# Altium PCB HV.PcbDoc
Units mm, origin at the board's own origin, x right, y up, seen from the top; angles counter-clockwise.
Board outline 87.12 x 40.28 mm, 2 copper layers (Top Layer, Bottom Layer), stack 1.021 mm thick; 135 components, 60 nets, 319 pads, 97 vias.
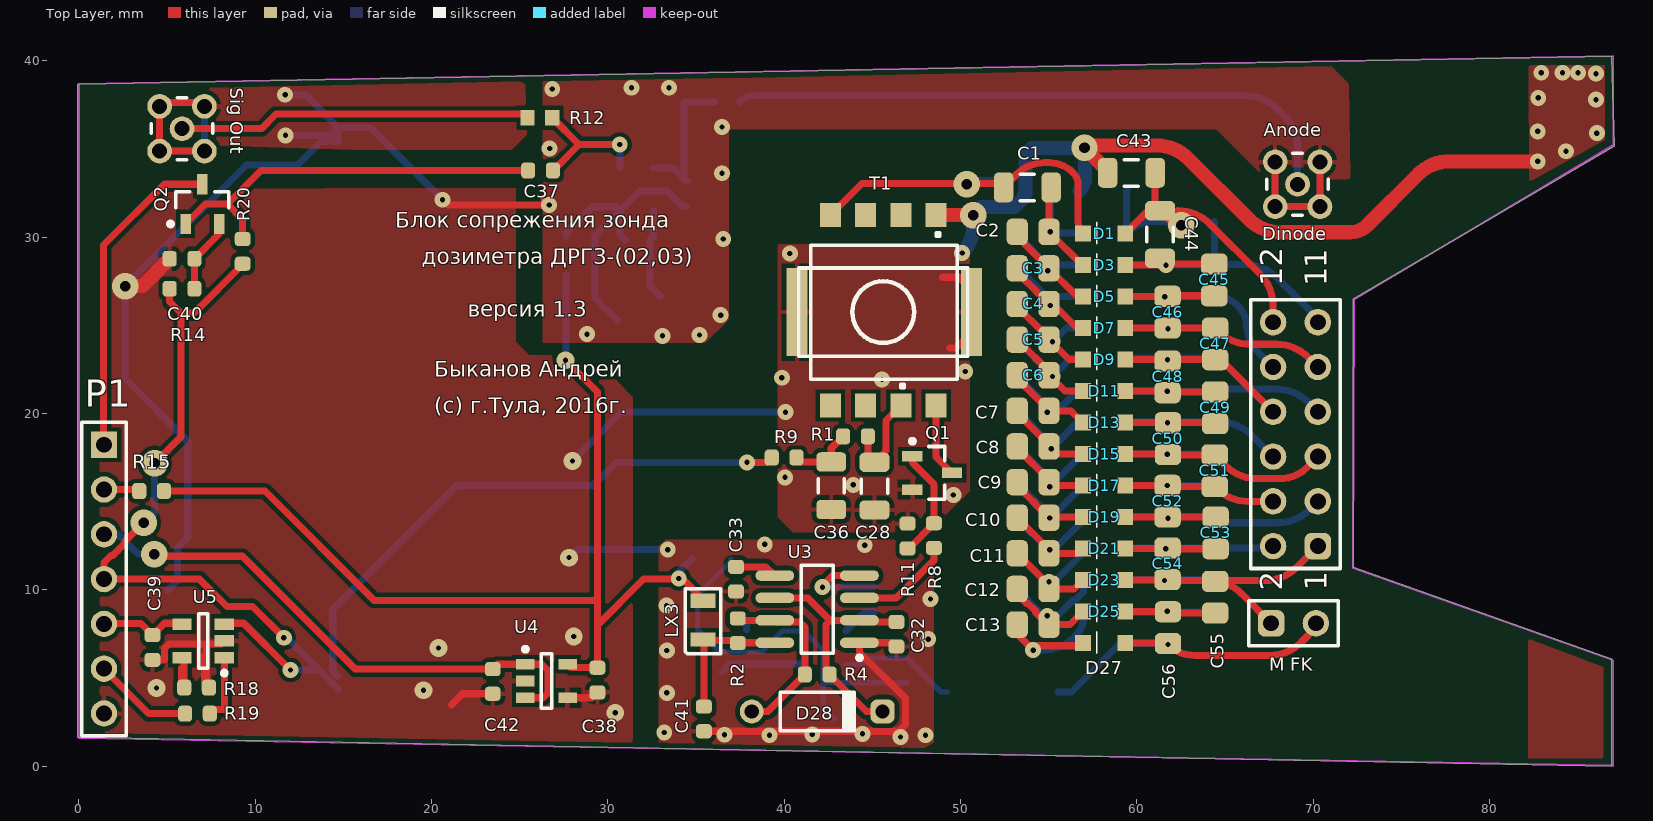
[diagram p0: Top Layer view]
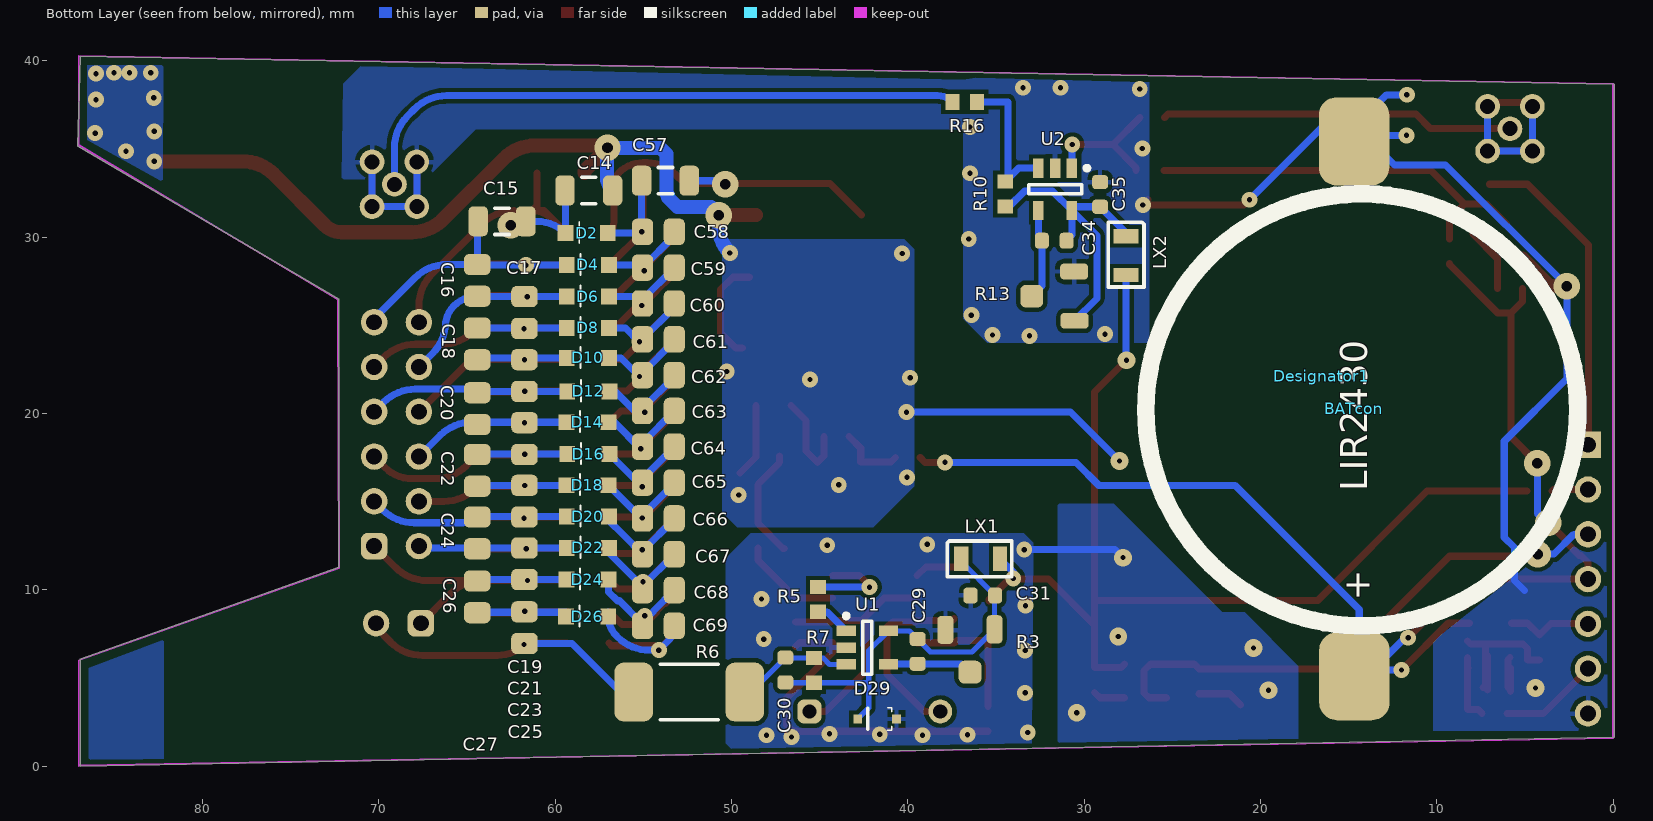
[diagram p1: Bottom Layer view, seen from below]

## Layer stack, top to bottom
Top Solder: solder mask 0.0102, Solder Resist, Dk 3.5
Top Layer: signal copper 0.0356
Dielectric1: dielectric 0.95, FR-4, Dk 4.8
Bottom Layer: signal copper 0.0356
Bottom Solder: solder mask 0.0102, Solder Resist, Dk 3.5

## Board outline
-0.05,38.675 86.95,40.25 87.073,35.15 72.275,26.475 72.275,11.275 86.95,6.05 86.95,-0.025 -0.05,1.625

## Design rules (kind name [scope] priority, off if disabled: settings)
Clearance [All] p1: gap=0.25
ComponentClearance [All] p1: gap=0.1 collisioncheckmode=3 verticalgap=0.254 showdistances=TRUE
HoleSize [All] p1: absolutevalues=TRUE maxlimit=2.54 minlimit=0.3 maxpercent=80.000 minpercent=20.000
HoleToHoleClearance [All] p1: gap=0.152 allowstackedmicrovias=TRUE
MinimumAnnularRing [All] p1: minimumring=0.2
MinimumSolderMaskSliver [All] p1: minsoldermaskwidth=0.152
PlaneClearance [All] p1: clearance=2
PlaneConnect [All] p1: planeconnectstyle=Relief reliefexpansion=0.457 reliefentries=4 reliefconductorwidth=0.3 reliefairgap=0.457
PolygonConnect PolygonConnect_via [IsVia] p1: connectstyle=Direct reliefconductorwidth=0.254 reliefentries=4 polygonreliefangle="90 Angle" airgapwidth=0.254
PolygonConnect [All] p2: connectstyle=Relief reliefconductorwidth=0.254 reliefentries=4 polygonreliefangle="90 Angle" airgapwidth=0.254
RoutingVias [All] p1: holewidth=0.3 width=0.62 viastyle="Through Hole" minholewidth=0.3 minwidth=0.62 maxholewidth=6 maxwidth=4
SilkToSilkClearance [All] p1: silktosilkclearance=0.152
SilkToSolderMaskClearance SilkscreenOverComponentPads [IsPad] p1: minsilkscreentomaskgap=0.1 clearancetoexposedcopper=TRUE
SolderMaskExpansion [All] p1: expansion=0.1
Width [All] p1: maxlimit=2.254 minlimit=0.2 preferedwidth=0.4
22 further rules are at their usual default settings.

## Components (designator, comment, footprint, x,y, rotation, side; value= is the part's Value field where it differs from the comment)
Anode "COAX-M" MMCX2.54-V5 69.125,33 r0 top
BATcon "Header 2" LIR2430 14.685,20.475 r90 bottom locked
C1 "100nF" C1206 53.8,32.825 r180 top
C2 "47nF" 0805_CAP 54.125,30.3 r0 top
C3 "47nF" 0805_CAP 54.125,28.23 r0 top
C4 "47nF" 0805_CAP 54.125,26.209 r0 top
C5 "47nF" 0805_CAP 54.125,24.189 r0 top
C6 "47nF" 0805_CAP 54.125,22.168 r0 top
C7 "47nF" 0805_CAP 54.125,20.148 r0 top
C8 "47nF" 0805_CAP 54.125,18.127 r0 top
C9 "47nF" 0805_CAP 54.125,16.107 r0 top
C10 "47nF" 0805_CAP 54.125,14.086 r0 top
C11 "47nF" 0805_CAP 54.125,12.066 r0 top
C12 "47nF" 0805_CAP 54.125,10.045 r0 top
C13 "47nF" 0805_CAP 54.125,8.025 r0 top
C14 "100nF" C1206 58.1,32.65 r180 bottom
C15 "100nF" C1206 63.025,30.9 r180 bottom
C16 "47nF" 0805_CAP 64.425,27.55 r90 bottom
C17 "47nF" 0805_CAP 61.75,25.725 r90 bottom
C18 "47nF" 0805_CAP 64.425,23.95 r90 bottom
C19 "47nF" 0805_CAP 61.75,22.15 r90 bottom
C20 "47nF" 0805_CAP 64.425,20.275 r90 bottom
C21 "47nF" 0805_CAP 61.75,18.575 r90 bottom
C22 "47nF" 0805_CAP 64.425,16.775 r90 bottom
C23 "47nF" 0805_CAP 61.75,15.025 r90 bottom
C24 "47nF" 0805_CAP 64.425,13.225 r90 bottom
C25 "47nF" 0805_CAP 61.75,11.475 r90 bottom
C26 "47nF" 0805_CAP 64.425,9.6 r90 bottom
C27 "47nF" 0805_CAP 61.75,7.85 r90 bottom
C28 "4.7uF" C1206 45.125,15.875 r270 top
C29 "1nF" 1608[0603]_CAP 39.45,6.5 r270 bottom
C30 "47pF" 1608[0603]_CAP 46.95,5.45 r90 bottom
C31 "1uF" 1608[0603]_CAP 35.75,9.675 r0 bottom
C32 "220pF" 1608[0603]_CAP 46.375,7.475 r90 top
C33 "1nF" 1608[0603]_CAP 37.275,10.6 r270 top
C34 "1nF" 1608[0603]_CAP 31.7,29.8 r0 bottom
C35 "1uF" 1608[0603]_CAP 29.1,32.425 r90 bottom
C36 "4.7uF" C1206 42.675,15.9 r270 top
C37 "10uF" 1608[0603]_CAP 26.185,33.782 r180 top
C38 "1uF" 1608[0603]_CAP 29.411,4.878 r90 top
C39 "1uF" 1608[0603]_CAP 4.175,6.725 r270 top
C40 "1uF" 1608[0603]_CAP 5.85,28.775 r180 top
C41 "1uF" 1608[0603]_CAP 35.45,2.675 r270 top
C42 "1uF" 1608[0603]_CAP 23.475,4.8 r270 top
C43 "100nF" C1206 59.7,33.65 r180 top
C44 "100nF" C1206 61.325,30.15 r90 top
C45 "47nF" 0805_CAP 64.4,27.575 r90 top
C46 "47nF" 0805_CAP 61.75,25.75 r90 top
C47 "47nF" 0805_CAP 64.45,23.95 r90 top
C48 "47nF" 0805_CAP 61.75,22.075 r90 top
C49 "47nF" 0805_CAP 64.45,20.325 r90 top
C50 "47nF" 0805_CAP 61.775,18.575 r90 top
C51 "47nF" 0805_CAP 64.425,16.75 r90 top
C52 "47nF" 0805_CAP 61.75,15.025 r90 top
C53 "47nF" 0805_CAP 64.475,13.225 r90 top
C54 "47nF" 0805_CAP 61.75,11.475 r90 top
C55 "47nF" 0805_CAP 64.45,9.575 r90 top
C56 "47nF" 0805_CAP 61.775,7.85 r90 top
C57 "100nF" C1206 53.75,33.2 r180 bottom
C58 "47nF" 0805_CAP 54.15,30.3 r0 bottom
C59 "47nF" 0805_CAP 54.15,28.268 r0 bottom
C60 "47nF" 0805_CAP 54.15,26.236 r0 bottom
C61 "47nF" 0805_CAP 54.15,24.205 r0 bottom
C62 "47nF" 0805_CAP 54.15,22.173 r0 bottom
C63 "47nF" 0805_CAP 54.15,20.141 r0 bottom
C64 "47nF" 0805_CAP 54.15,18.109 r0 bottom
C65 "47nF" 0805_CAP 54.15,16.077 r0 bottom
C66 "47nF" 0805_CAP 54.15,14.045 r0 bottom
C67 "47nF" 0805_CAP 54.15,12.014 r0 bottom
C68 "47nF" 0805_CAP 54.15,9.982 r0 bottom
C69 "47nF" 0805_CAP 54.15,7.95 r0 bottom
D1 "" DA2JF8100L 59.35,30.2 r180 top
D2 "" DA2JF8100L 57.025,30.225 r0 bottom
D3 "" DA2JF8100L 59.35,28.414 r180 top
D4 "" DA2JF8100L 56.95,28.425 r0 bottom
D5 "" DA2JF8100L 59.35,26.627 r180 top
D6 "" DA2JF8100L 56.95,26.625 r0 bottom
D7 "" DA2JF8100L 59.35,24.84 r180 top
D8 "" DA2JF8100L 56.95,24.85 r0 bottom
D9 "" DA2JF8100L 59.35,23.054 r180 top
D10 "" DA2JF8100L 56.95,23.15 r0 bottom
D11 "" DA2JF8100L 59.35,21.267 r180 top
D12 "" DA2JF8100L 56.925,21.25 r0 bottom
D13 "" DA2JF8100L 59.35,19.481 r180 top
D14 "" DA2JF8100L 56.975,19.5 r0 bottom
D15 "" DA2JF8100L 59.35,17.694 r180 top
D16 "" DA2JF8100L 56.925,17.7 r0 bottom
D17 "" DA2JF8100L 59.35,15.907 r180 top
D18 "" DA2JF8100L 56.975,15.925 r0 bottom
D19 "" DA2JF8100L 59.35,14.121 r180 top
D20 "" DA2JF8100L 56.95,14.15 r0 bottom
D21 "" DA2JF8100L 59.35,12.334 r180 top
D22 "" DA2JF8100L 56.95,12.375 r0 bottom
D23 "" DA2JF8100L 59.35,10.548 r180 top
D24 "" DA2JF8100L 56.975,10.575 r0 bottom
D25 "" DA2JF8100L 59.35,8.761 r180 top
D26 "" DA2JF8100L 57,8.475 r0 bottom
D27 "" DA2JF8100L 59.35,6.975 r180 top
D28 "1N4148" GRZZ0002ZB-A 41.875,3.095 r180 top
D29 "TDZ3V3J" SC-90 40.65,2.675 r0 bottom
Designator1 "Comment" "Logo Micron" 16.525,22.125 r180 bottom locked
Dinode "Header 6X2" HDR2X6 70.275,12.475 r90 top
LX1 "22uH" Resistor 35.875,11.75 r0 bottom
LX2 "22uH" Resistor 27.625,28.95 r90 bottom
LX3 "22uH" Resistor 35.4,8.275 r270 top
"M FK" "Header 2" HDR1X2 67.625,8.1 r0 top
P1 "Header 7" HDR1X7 1.425,18.225 r270 top
Q1 "IRLML6344" SOT-23_N 48.4,16.625 r0 top
Q2 "IRLML6401" Micro3_N 7,31.875 r90 top
R1 "12R" 1608[0603]_RES 44.05,18.7 r180 top
R2 "47k" 1608[0603]_RES 37.375,7.675 r270 top
R3 "100K" 3223W 36.475,5.325 r0 bottom
R4 "150k" 1608[0603]_RES 41.875,5.195 r180 top
R5 "1K" 1608[0603] 45.1,9.45 r90 bottom
R6 "5G" HVF2512T5007FE 49.25,2.525 r180 bottom
R7 "6,04M" 1608[0603] 45.325,5.425 r90 bottom
R8 "120R" 1608[0603]_RES 48.5,13.075 r270 top
R9 "12R" 1608[0603]_RES 40,17.5 r180 top
R10 "390K" 1608[0603] 34.475,32.449 r270 bottom
R11 "47k" 1608[0603]_RES 47.002,13.05 r270 top
R12 "1K" 1608[0603] 26.15,36.775 r0 top
R13 "100K" 3223W 32.975,26.65 r90 bottom
R14 "270R" 1608[0603]_RES 5.85,27.075 r180 top
R15 "1K" 1608[0603]_RES 4.125,15.6 r180 top
R16 "0R" 1608[0603] 36.775,37.675 r180 bottom
R18 "33k" 1608[0603]_RES 6.675,4.45 r0 top
R19 "470R" 1608[0603]_RES 6.725,2.975 r180 top
R20 "47k" 1608[0603]_RES 9.29,29.193 r90 top
"Sig Out" "COAX-M" MMCX2.54-V5 5.85,36.15 r90 top
T1 "BAT-ER9-01" "Epcos ER9.5/5" 42.625,31.25 r270 top
U1 "AD8541ARTZ" ADI-RJ-5_N 42.3,6.714 r180 bottom
U2 "AD8541ARTZ" ADI-RJ-5_N 31.648,32.713 r270 bottom
U3 "LMC555CM" M08A_N 41.875,8.9 r180 top
U4 "TPS78330DDCR" TI-DDC5_N 26.525,4.825 r0 top
U5 "MCP73831T-2ACI/OT" SOT-23-OT5_N 7.05,7.1 r180 top

## Footprints (in the part's own frame and the unit in brackets; to place one, negate y for a bottom-side part, rotate by r counter-clockwise, add the part's x,y. Pads: shape width x height; smd on the part's side, far side on the other; paste and mask are expansions set on the pad)
0805_CAP [mm]
  rrect50% 1.2x1.5 smd: 1(-0.9,0) 2(0.9,0)
  body extent -1.11,-0.72 1.1,0.72, height 0.94
1608[0603] [mm] "Chip Capacitor, Body 1.6x0.8mm, IPC High Density"
  rect 0.8x0.9 smd: 1(-0.7,0) 2(0.7,0)
  body extent -0.87,-0.48 0.87,0.48, height 1.3
1608[0603]_CAP [mm] "Chip Capacitor, Body 1.6x0.8mm, IPC High Density"
  rrect50% 0.8x0.9 smd: 1(-0.7,0) 2(0.7,0)
  body extent -0.85,-0.45 0.85,0.45, height 0.8
1608[0603]_RES [mm] "Chip Capacitor, Body 1.6x0.8mm, IPC High Density"
  rrect50% 0.8x0.9 smd: 1(-0.7,0) 2(0.7,0)
  body extent -0.85,-0.45 0.85,0.45, height 0.45
3223W [mm]
  rrect50% 0.9x1.6 smd: 1(-1.39,-2.43) 2(1.4,-2.4)
  rrect50% 1.3x1.3 smd: 3(0,0)
  body extent -1.97,-3.19 1.97,0.59, height 3.9
ADI-RJ-5_N [mm] "SOT-23, 5-Leads, Body 2.9x1.6mm, Pitch 0.95mm, IPC Medium Density"
  rect 1.1x0.6 smd: 1(-1.2,0.95) 2(-1.2,0) 3(-1.2,-0.95) 4(1.2,-0.95) 5(1.2,0.95)
  silkscreen extent -1.33,-1.5 0.25,1.92, body extent -0.85,-1.5 0.85,1.5, height 1.45
C1206 [mm] "Chip Capacitor, Body 3.2x1.6mm, IPC High Density"
  rrect50% 1.1x1.7 smd: 1(-1.35,0) 2(1.35,0)
  silkscreen extent -0.4,-0.75 0.4,0.75, body extent -1.6,-0.81 1.6,0.79, height 1.6
DA2JF8100L [mm]
  rect 0.9x0.9 smd: 1(0,0) 2(2.4,0)
  silkscreen extent 1.62,-0.64 1.62,0.57, body extent 0.36,-0.65 2.06,0.6, height 0.7
"Epcos ER9.5/5" [mm]
  rect 1.35x1.2 smd: 1(0,6) 2(0,4) 3(0,2) 4(0,0) 5(10.8,6) 6(10.8,4) 7(10.8,2) 8(10.8,0)
  rect 5x1.2 smd: GND(5.5,8) GND(5.5,-1.9)
  silkscreen extent 1,-1.8 9.8,7.8, body extent -0.4,-1.2 11.2,7.3, height 4.45
GRZZ0002ZB-A [mm] "Diode, Axial; Body 4.2 x 2.2 mm (LxDia. max), Lead Dia. 0.5 mm (nom)"
  rrect50% 1.35x1.35 hole 0.8: 1(-3.71,0)
  round 1.35 hole 0.8: 2(3.71,0)
  silkscreen extent -2.2,-1.1 2.1,1.1, body extent -2.1,-1.1 2.1,1.1, height 2.2
HDR1X2 [mm] "Connector; Header; 2 Position"
  rrect50% 1.5x1.5 hole 0.9: 1(0,0)
  round 1.5 hole 0.9: 2(2.54,0)
  silkscreen extent -1.27,-1.27 3.81,1.27
HDR1X7 [mm] "Connector; Header; 7 Position"
  rect 1.5x1.5 hole 0.9: 1(0,0)
  round 1.5 hole 0.9: 2(2.54,0) 3(5.08,0) 4(7.62,0) 5(10.16,0) 6(12.7,0) 7(15.24,0)
  silkscreen extent -1.27,-1.27 16.51,1.27
HDR2X6 [mm] "Connector; Header; 6x2 Position"
  rrect50% 1.5x1.5 hole 0.9: 1(0,0)
  round 1.5 hole 0.9: 2(0,2.54) 3(2.54,0) 4(2.54,2.54) 5(5.08,0) 6(5.08,2.54) 7(7.62,0) 8(7.62,2.54) 9(10.16,0) 10(10.16,2.54) 11(12.7,0) 12(12.7,2.54)
  silkscreen extent -1.27,-1.27 13.97,3.81
HVF2512T5007FE [mm] "Chip Resistor, 2-Leads, Body 7,31x3,20mm, IPC Low Density"
  rrect50% 2.2x3.35 smd: 1(-6.3,1.675) 2(0,1.675)
  silkscreen extent -4.8,0.1 -1.5,3.25, body extent -6.8,0.08 0.51,3.27, height 0.82
LIR2430 [mm]
  rrect50% 5x4 smd: 1(-15.38,-0.01) 2(14.96,0.01)
  silkscreen extent -12.52,-12.68 11.98,11.82
"Logo Micron" [mm]
M08A_N [mm] "SOIC, 8-Leads, Body 4.9x3.9mm, Pitch 1.27mm, IPC Medium Density"
  oval 2.2x0.6 smd: 1(-2.4,1.905) 2(-2.4,0.635) 3(-2.4,-0.635) 4(-2.4,-1.905) 5(2.4,-1.905) 6(2.4,-0.635) 7(2.4,0.635) 8(2.4,1.905)
  silkscreen extent -2.53,-2.5 0.9,2.88, body extent -2,-2.5 2,2.5, height 1.75
Micro3_N [mm] "SOT23, 3-Leads, Body 2.9x1.3mm, Pitch 0.95mm, Lead Span 2.3mm, IPC Medium Density"
  rect 1.15x0.6 smd: 1(-1.125,0.95) 2(-1.125,-0.95) 3(1.125,0)
  silkscreen extent -1.25,-1.5 0.7,1.92, body extent -0.7,-1.5 0.7,1.5, height 1.12
MMCX2.54-V5 [mm] "Connector; RF Coaxial, MMCX, Thru-Hole; 5 Position; Vertical"
  round 1.4 hole 0.85: 1(0,0) 2(-1.27,-1.27) 3(1.27,-1.27) 4(1.27,1.27) 5(-1.27,1.27)
  silkscreen extent -1.75,-1.75 1.75,1.75
Resistor [mm]
  rect 0.8x1.4 smd: 1(-1.1,0) 2(1.1,0)
  silkscreen extent -1.78,-1.02 1.9,1.02, body extent -1.1,-0.7 1.2,0.7, height 1
SC-90 [mm]
  rect 0.5x0.5 smd: 1(0,0) 2(2.2,0)
  silkscreen extent 0.26,-0.63 1.64,0.64, body extent 0.21,-0.7 2.01,0.7, height 0.9
SOT-23-OT5_N [mm] "SOT23, 5-Leads, Body 2.9x1.6mm, Pitch 0.95mm, Lead Span 2.7mm, IPC Medium Density"
  rect 1.1x0.65 smd: 1(-1.2,0.95) 2(-1.2,0) 3(-1.2,-0.95) 4(1.2,-0.95) 5(1.2,0.95)
  silkscreen extent -1.33,-1.55 0.25,1.95, body extent -0.9,-1.55 0.9,1.55, height 1.45
SOT-23_N [mm] "SOT23, 3-Leads, Body 2.9x1.3mm, Pitch 0.95mm, Lead Span 2.3mm, IPC Medium Density"
  rect 1.15x0.6 smd: 1(-1.125,0.95) 2(-1.125,-0.95) 3(1.125,0)
  silkscreen extent -1.25,-1.5 0.7,1.92, body extent -0.7,-1.5 0.7,1.5, height 1.11
TI-DDC5_N [mm] "SOT23, 5-Leads, Body 2.9x1.6mm, Pitch 0.95mm, IPC Medium Density"
  rect 1.05x0.6 smd: 1(-1.2,0.95) 2(-1.2,0) 3(-1.2,-0.95) 4(1.2,-0.95) 5(1.2,0.95)
  silkscreen extent -1.32,-1.55 0.3,1.92, body extent -0.87,-1.52 0.87,1.53, height 1.1

## Part data
Anode "Sig Out": "RF Coaxial PCB Connector, MMCX; Thru-Hole, Vertical Mount Plug,  50 Ohm Impedance"
BATcon "M FK": "Header, 2-Pin"
C1 C2 C3 C4 C5 C6 C7 C8 C9 C10 C11 C12 C13 C14 C15 C16 C17 C18 C19 C20 C21 C22 C23 C24 C25 C26 C27 C28 C29 C30 C31 C32 C33 C34 C35 C36 C37 C38 C39 C40 C41 C42 C43 C44 C45 C46 C47 C48 C49 C50 C51 C52 C53 C54 C55 C56 C57 C58 C59 C60 C61 C62 C63 C64 C65 C66 C67 C68 C69: library part "Cap Semi", "Capacitor (Semiconductor SIM Model)"
D1 D2 D3 D4 D5 D6 D7 D8 D9 D10 D11 D12 D13 D14 D15 D16 D17 D18 D19 D20 D21 D22 D23 D24 D25 D26 D27: library part Diode, "Default Diode"
D28: "Silicon Epitaxial Planar Diode for Various Detector, Modulator, Demodulator"
D29: library part "D Zener", "Zener Diode"
Dinode: "Header, 6-Pin, Dual row"
LX1 LX2 LX3 R1 R2 R4 R5 R6 R7 R8 R9 R10 R11 R12 R14 R15 R16 R18 R19 R20: library part "Resistor 0805"
P1: "Header, 7-Pin"
Q1: library part IRLML2402, "HEXFET Power MOSFET"
Q2: "HEXFET Power MOSFET"
R3 R13: library part "Res Tap", "Tapped Resistor"
T1: library part "Epcos ER9.5/5"
U1 U2: library part AD8541ARTZ-R2, "Single Channel RRIO Operational Amplifier, 1 MHz BW, 920 mV/us SR, Industrial, 5-pin SOT23 (RJ-5), Reel"
U3: "CMOS Timer, 8-pin Narrow SOIC"
U4: "Single Output LDO, 150 mA, Fixed 3 V Output, 2.2 to 5.5 V Input, with Ultra-Low IQ, 5-pin SOT (DDC), -40 to 105 degC, Green (RoHS & no Sb/Br)"
U5: "Miniature Single-Cell, Fully Integrated Li-Ion, Li-Polymer Charge Management Controller, 4.2V, 5-Pin SOT-23, Industrial Temperature, Tape and Reel"

## Via types
v1: diameter 0.9, hole 0.3, Top Layer to Bottom Layer, tented both sides, 81 vias
v2: diameter 1.5, hole 0.6, Top Layer to Bottom Layer, tented both sides, 8 vias
v3: diameter 1, hole 0.3, Top Layer to Bottom Layer, tented both sides, 8 vias

## Nets (pads, with @x,y where several pads share a name; then routed paths per layer and width w, separated by ;. In a path a pad name is that pad's centre, name@x,y a point inside that pad or via, vN(x,y) a via of type N, cw(c..) or ccw(c..) an arc to the next point about the centre after c; other vN are vias at no path point)
ANODE: Anode.1 R16.1 | length 35.4
  Bottom Layer w0.4: R16.1 cw(c38.32,36.83) 38.32,38.025 66.173,38.025 cw(c66.173,35.485) 67.969,37.281 68.381,36.869 cw(c66.585,35.073) 69.125,35.073 Anode.1
BAT: BATcon.1 P1.4 R9.2 R14.2 R20.1 U5.3 | length 78.3
  Top Layer w0.4: v2(3.675,13.8) 2.625,12.75 2.625,12.648 1.922,11.945 1.82,11.945 1.425,11.55 P1.4 1.44,10.62 6.83,10.62 8.4,9.05 9.85,9.05 v1(11.625,7.275) ; v2(4.3,17.175) 5.8,18.675 5.8,25.7 ; R14.2 5.15,26.35 5.8,25.7 ; U5.3@8.15,8.1 9.35,8.1 v1(12,5.45) ; R20.1 9.29,28.446 6.544,25.7 5.8,25.7 ; v1(37.9,17.225) 39.025,17.225 R9.2
  Bottom Layer w0.4: v2(3.675,13.8) 3.675,13.7 4.3,14.325 v2(4.3,17.175) ; v1(11.625,7.275) 11.795,7.275 BATcon.1@13.62,5.45 ; v1(12,5.45) BATcon.1@13.62,5.45 ; BATcon.1 14.4,5.37 14.4,8.875 21.45,15.925 29.175,15.925 30.475,17.225 v1(37.9,17.225) ; BATcon.1@14.715,4.355 BATcon.1@13.62,5.45
"DINODE 1": "M FK.1" C25.1 C26.2 C54.1 C55.2 D23.1 D24.2 Dinode.1 | length 21
  Top Layer w0.4: D23.1 C54.1@61.552,10.548 ; v1(61.575,10.525) C55.2@64.148,10.525 ; 67.625,8.1 65.944,9.781 ccw(c64.148,7.985) C55.2@64.148,10.525 ; Dinode.1 69.069,11.269 cw(c67.273,13.065) 67.273,10.525 C55.2@64.148,10.525
  Bottom Layer w0.4: D24.2 C25.1@61.575,10.575 ; v1(61.575,10.525) C25.1@61.7,10.525 ; C25.1 64.35,10.575 C26.2
"DINODE 2": C24.1 C25.2 C53.1 C54.2 D21.1 D22.2 Dinode.2 | length 13.5
  Top Layer w0.4: D21.1 61.641,12.334 v1(61.65,12.325) C53.1
  Bottom Layer w0.4: D22.2 C25.2@61.65,12.375 ; v1(61.65,12.325) C25.2@61.7,12.325 ; C25.2 67.494,12.375 ccw(c67.494,12.716) Dinode.2
"DINODE 3": C23.1 C24.2 C52.1 C53.2 D19.1 D20.2 Dinode.3 | length 16.6
  Top Layer w0.4: D19.1 61.704,14.121 v1(61.775,14.05) ; C52.1 C53.2
  Bottom Layer w0.4: D20.2 64.4,14.15 ccw(c65.245,14.995) 65.245,13.8 68.008,13.8 ccw(c68.008,16.34) 69.804,14.544 Dinode.3 ; v1(61.775,14.05) C23.1@61.775,14.1
"DINODE 4": C22.1 C23.2 C51.1 C52.2 D17.1 D18.2 Dinode.4 | length 13.8
  Top Layer w0.4: D17.1 v1(61.733,15.907) ; C52.2 C52.2@61.825,15.85 ; C52.2@62.025,15.65 C52.2@61.825,15.85 ; C51.1@64.3,15.85 C52.2@61.825,15.85 ; C51.1 64.516,15.759 ccw(c66.312,17.555) 64.632,15.65 ccw(c66.312,17.555) 66.312,15.015 Dinode.4
  Bottom Layer w0.4: D18.2 C23.2@61.733,15.925 ; v1(61.733,15.907) C23.2 C22.1@64.375,15.925
"DINODE 5": C21.1 C22.2 C50.1 C51.2 D15.1 D16.2 Dinode.5 | length 16.9
  Top Layer w0.4: D15.1 v1(61.731,17.694) ; C50.1 61.8,17.65 C51.2 65.031,17.044 ccw(c66.827,18.84) 66.476,16.324 ccw(c66.827,18.84) 66.827,16.3 68.125,16.3 ccw(c68.125,18.461) 69.653,16.933 Dinode.5
  Bottom Layer w0.4: D16.2 C21.1@61.731,17.7 ; v1(61.731,17.694) C21.1 ; C21.1@61.75,17.7 64.4,17.7 C22.2
"DINODE 6": C20.1 C21.2 C49.1 C50.2 D13.1 D14.2 Dinode.6 | length 14.1
  Top Layer w0.4: D13.1 v1(61.744,19.481) ; C50.2 64.329,19.475 cw(c64.329,19.304) C49.1
  Bottom Layer w0.4: D14.2 C21.2@61.744,19.5 ; v1(61.744,19.481) C21.2 ; C21.2@61.75,19.5 64.738,19.5 cw(c64.738,16.96) 66.534,18.756 Dinode.6
"DINODE 7": C19.1 C20.2 C48.1 C49.2 D11.1 D12.2 Dinode.7 | length 16.5
  Top Layer w0.4: D11.1 61.425,21.267 ccw(c61.527,21.369) 61.527,21.225 C49.2
  Bottom Layer w0.4: D12.2 C19.1 ; v1(61.733,21.267) C19.1 ; Dinode.7 69.739,20.631 ccw(c67.943,18.835) 67.943,21.375 64.652,21.375 ccw(c64.652,20.948) 64.35,21.25 C19.1
"DINODE 8": C18.1 C19.2 C47.1 C48.2 D9.1 D10.2 Dinode.8 | length 14.9
  Top Layer w0.4: D9.1 v1(61.746,23.054) 61.75,23.05 C47.1 cw(c64.45,22.253) C47.1@65.013,22.817 ; C47.1@65.013,22.817 Dinode.8 Dinode.8@67.405,20.095
  Bottom Layer w0.4: D10.2 C19.2@61.746,23.15 ; C19.2@61.75,23.15 C18.1@64.325,23.15
"DINODE 9": C17.1 C18.2 C46.1 C47.2 D7.1 D8.2 Dinode.9 | length 16.7
  Top Layer w0.4: D7.1 C46.1@61.75,24.84 ; C46.1 C47.2 64.631,24.669 ccw(c66.427,26.465) 66.427,23.925 67.933,23.925 cw(c67.933,21.385) 69.729,23.181 Dinode.9
  Bottom Layer w0.4: D8.2 C17.1@61.75,24.85 ; C17.1 v1(61.775,24.8) ; C17.1@61.775,24.85 C18.2
"DINODE 10": C16.1 C17.2 C45.1 C46.2 D5.1 D6.2 Dinode.10 | length 18
  Top Layer w0.4: D5.1 v1(61.598,26.627) 61.646,26.675 C45.1
  Bottom Layer w0.4: D6.2 C17.2@61.6,26.625 ; v1(61.598,26.627) C17.2@61.6,26.625 ; 66.226,25.139 ccw(c64.566,24.916) 65.751,26.099 ; 66.225,25.197 ccw(c68.765,25.197) 66.969,23.401 Dinode.10 ; 66.241,24.916 ccw(c64.566,24.916) 65.75,26.1 ; C17.2@61.6,26.625 C16.1@64.73,26.625 ; C16.1 cw(c64.425,24.779) C16.1@64.73,26.625 ; C16.1 cw(c64.425,24.779) C16.1@64.73,26.625 ; C16.1 cw(c64.425,24.779) C16.1@64.73,26.625 ; C16.1@64.73,26.625 cw(c64.425,24.779) 65.748,26.102 65.75,26.1
"DINODE 11": C15.1 C16.2 C44.1 C45.2 D3.1 D4.2 Dinode.11 | length 19.8
  Top Layer w0.4: D3.1 v1(61.661,28.414) 61.723,28.475 C45.2
  Bottom Layer w0.4: D4.2 v1@61.661,28.425 ; v1(61.661,28.414) v1@61.689,28.414 ; v1@61.689,28.425 64.4,28.425 C16.2 ; C15.1 64.425,30.85 C16.2 ; Dinode.11 ccw(c69.792,25.175) 70.134,25.516 67.944,27.706 ccw(c66.148,25.91) 66.148,28.45 C16.2
"DINODE 12": C14.1 C15.2 C43.1 C44.2 D1.1 D2.2 Dinode.12 | length 22.4
  Top Layer w0.4: D1.1 60.173,31.023 ; C43.1 61.05,31.775 C44.2 ; 62.348,31.5 cw(c62.348,28.96) 64.144,30.756 66.991,27.909 cw(c65.195,26.113) 67.735,26.113 Dinode.12 ; v2(62.525,30.675) 62,30.675 ccw(c61.638,30.675) 61.894,30.931 C44.2 ; 60.173,31.023 cw(c61.325,29.87) C44.2 ; 60.173,31.023 60.65,31.5 C44.2
  Bottom Layer w0.4: C14.1 59.425,32.625 D2.2 cw(c61.055,28.595) 61.055,30.9 C15.2 ccw(c62.218,31.443) 62.218,30.675 v2(62.525,30.675)
FOTO-KAT: "M FK.2" C27.1 C56.1 D27.1 R6.1 | length 18.9
  Top Layer w0.4: D27.1 61.7,6.975 v1(61.775,6.9) ccw(c63.278,8.403) 63.278,6.277 67.54,6.277 ccw(c67.54,8.817) 69.336,7.021 70.165,7.85
  Bottom Layer w0.4: R6.1 56.3,4.2 59.05,6.95 C27.1 ; v1(61.775,6.9) C27.1@61.775,6.925
GND: "Sig Out.2" "Sig Out.3" "Sig Out.4" "Sig Out.5" Anode.2 Anode.3 Anode.4 Anode.5 BATcon.2 C14.2 C28.2 C31.2 C32.1 C33.2 C35.2 C36.2 C38.1 C39.2 C40.2 C41.2 C42.2 C43.2 D29.1 P1.7 Q1.2 R3.2 R11.1 R13.2 R18.2 T1.1 T1.GND U1.2 U2.2 U3.1 U4.2 U4.4 U5.2 | length 196.7
  Top Layer w0.4: C39.2 4.85,6.025 4.85,6.661 5.114,6.925 7.25,6.925 ; 7.12,34.88 4.58,34.88 4.58,37.42 4.58,37.625 7.12,37.625 ; R18.2@7.125,4.325 7.125,6.275 ; R18.2 7.25,4.575 7.25,6.925 ; U5.2 8.075,6.925 7.25,6.925 ; v1@11.65,38.025 v1(11.7,38.075) ; v1(20.625,32.125) 20.925,31.825 v1(26.675,31.825) v1@26.375,32.125 ; 21.125,3.475 21.75,4.1 C42.2 ; U4.4 29.109,3.875 C38.1 ; C41.2 37.694,1.975 37.699,1.97 38.631,1.97 38.636,1.975 44.916,1.975 44.921,1.97 46.249,1.97 46.254,1.975 46.525,1.975 46.875,2.325 46.875,3.85 44.275,6.45 U3.1 46.155,6.995 C32.1 ; 49,27.725 49.925,27.725 50.625,27.025 50.625,25.75 50.625,24.575 49.775,23.725 49.375,23.725 ; Anode.5 Anode.2 Anode.3 Anode.4
  Top Layer w0.8: v2(2.625,27.225) 3.6,27.225 C40.2 ; T1.1 v2(50.725,31.25) ; C43.2 ccw(c58.109,33.65) 58.279,33.821 v2(57.04,35.06) 56.9,35.2 61.123,35.2 cw(c61.123,32.66) 62.919,34.456 66.356,31.019 ccw(c68.152,32.815) 66.794,30.668 ccw(c68.152,32.815) 68.152,30.275 72.109,30.275 ccw(c72.109,31.641) 73.075,30.675 75.956,33.556 cw(c77.752,31.76) 77.752,34.3 v1(82.75,34.3)
  Bottom Layer w0.4: 4.58,37.42 4.58,34.88 7.12,34.88 7.12,37.345 ; 5.025,9.95 5.6,10.525 5.6,12.397 6.175,12.972 6.175,18.425 2.625,21.975 v2(2.625,27.225) 9.5,34.1 12.4,34.1 13.735,35.435 BATcon.2 BATcon.2@14.695,36.225 ; v1(11.7,38.075) 12.845,38.075 BATcon.2@14.695,36.225 ; v1(11.725,35.775) 14.245,35.775 BATcon.2@14.695,36.225 ; v1(20.625,32.125) 16.525,36.225 BATcon.2@14.695,36.225 ; v3(27.8,11.825) 28.25,12.275 v1(33.4,12.275) ; v3(28,17.3) 30.775,20.075 v1(40.075,20.075) ; R3.2 R3.2@37.875,8.25 ; Anode.5 Anode.2 Anode.3 Anode.4
  Bottom Layer w0.8: v1(50.1,29.1) ccw(c48.591,30.609) 50.725,30.609 v2(50.725,31.25) 51.175,31.7 52.325,31.7 53.058,31.7 53.6,32.242 53.6,32.375 53.7,32.475 53.7,34.725 54.035,35.06 v2(57.04,35.06) ; C14.2 ccw(c55.965,33.435) 57.075,33.435 57.075,34.975 v2@57.04,34.975
  other v1: 46.6,1.65 39.175,1.75 48.025,1.75 36.625,1.775 41.6,1.8 44.45,1.825 33.2,1.9 33.35,4.15 33.35,6.55 48.175,7.2 33.325,9.1 48.3,9.475 44.575,12.525 38.9,12.575 49.6,15.375 43.925,15.95 40.05,16.375 45.55,21.925 39.875,22.025 50.275,22.375 33.1,24.4 35.2,24.45 28.825,24.5 36.4,25.575 40.325,29.075 36.55,29.9 36.475,33.625 84.35,34.875 26.7,35.025 86.1,35.9 82.75,36 36.475,36.25 86.05,37.8 82.775,37.9 26.85,38.4 31.35,38.475 33.475,38.475 86.05,39.275 82.95,39.325 84.15,39.325 85.025,39.325
  other v3: 30.425,3.025 19.55,4.3 4.4,4.425 20.4,6.7 28.075,7.35
NetC1_1: C1.1 C2.2 C57.1 C58.2 D2.1 D3.2 | length 10.1
  Top Layer w0.4: C2.2@55.063,30.263 56.911,28.414 D3.2 ; v1(55.1,30.3) C2.2 55.025,32.523 cw(c55.452,32.523) C1.1
  Bottom Layer w0.4: C57.1 v1(55.1,30.3) 55.175,30.225 D2.1
NetC2_1: C2.1 C3.2 C58.1 C59.2 D4.1 D5.2 | length 10.4
  Top Layer w0.4: C2.1 53.225,30.03 53.825,29.43 53.836,29.43 54.275,28.99 54.275,28.98 C3.2 56.628,26.627 D5.2 ; v1(54.95,28.1) C3.2@55.025,28.175
  Bottom Layer w0.4: C58.1 53.25,30.079 55.05,28.279 C59.2 ; v1(54.95,28.1) 55.275,28.425 D4.1
NetC3_1: C3.1 C4.2 C59.1 C60.2 D6.1 D7.2 | length 10.1
  Top Layer w0.4: C3.1@53.05,28.18 53.05,28.175 53.816,27.409 53.836,27.409 54.275,26.97 54.275,26.95 v1(55.1,26.125) ; C4.2@55.215,26.24 56.614,24.84 D7.2
  Bottom Layer w0.4: C59.1 53.25,28.258 55.05,26.458 C60.2 ; v1(55.1,26.125) 55.6,26.625 D6.1
NetC4_1: C4.1 C5.2 C60.1 C61.2 D8.1 D9.2 | length 9.5
  Top Layer w0.4: C4.1@53.075,26.209 C5.2@54.875,24.409 ; C5.2@55.182,24.032 56.16,23.054 D9.2
  Bottom Layer w0.4: C60.1 53.25,26.015 55.05,24.215 C61.2 ; C61.2@55.238,24.063 56.025,24.85 D8.1
  other v1: 55.225,24.075
NetC5_1: C5.1 C6.2 C61.1 C62.2 D10.1 D11.2 | length 10.1
  Top Layer w0.4: C5.1 53.975,23.439 53.975,23.428 54.414,22.989 54.425,22.989 55.025,22.389 C6.2 C6.2@55.091,22.102 ; C5.1@53.275,24.189 C5.1@53.275,24.275 ; C6.2@55.157,22.168 v1(55.225,22.1) ; C6.2@55.159,22.034 55.926,21.267 D11.2
  Bottom Layer w0.4: C61.1 53.25,24.1 55.05,22.3 C62.2 ; v1(55.225,22.1) 56.275,23.15 D10.1
NetC6_1: C6.1 C7.2 C62.1 C63.2 D12.1 D13.2 | length 10.2
  Top Layer w0.4: C6.1 53.225,21.975 C7.2@55.05,20.15 ; C6.1@53.275,22.275 C6.1@53.303,22.247 ; v1(54.925,20.075) C7.2@54.975,20.075 ; C7.2 56.283,20.148 D13.2
  Bottom Layer w0.4: C62.1 53.25,22.075 C63.2@55.05,20.275 ; v1(54.925,20.075) C63.2@55.02,20.17 ; C63.2 55.491,20.141 56.6,21.25 D12.1
NetC7_1: C7.1 C8.2 C63.1 C64.2 D14.1 D15.2 | length 9.4
  Top Layer w0.4: C7.1@53.25,20.15 53.25,20 C8.2@55.05,18.2 ; v1(55.15,18) C8.2@55.15,18.002 ; C8.2@55.458,17.694 D15.2
  Bottom Layer w0.4: C63.1 53.25,20.13 55.05,18.33 C64.2 ; v1(55.15,18) 56.65,19.5 D14.1
NetC8_1: C8.1 C9.2 C64.1 C65.2 D16.1 D17.2 | length 10.3
  Top Layer w0.4: C8.1@53.25,18.2 53.25,18 C9.2@55.05,16.2 ; v1(55.075,15.85) 55.075,16.057 55.224,15.907 D17.2
  Bottom Layer w0.4: C64.1 53.25,18.098 55.05,16.298 C65.2 ; v1(55.075,15.85) D16.1
NetC9_1: C9.1 C10.2 C65.1 C66.2 D18.1 D19.2 | length 10.2
  Top Layer w0.4: C9.1 53.225,15.886 53.825,15.286 53.836,15.286 54.275,14.847 54.275,14.836 C10.2 ; C9.1@53.25,16.107 C9.1@53.25,16.2 ; C10.2@55.036,14.075 v1(55.075,14.075) ; C10.2@55.075,14.121 D19.2
  Bottom Layer w0.4: C65.1 53.25,16.025 55.075,14.2 v1(55.075,14.075) 55.125,14.075 D18.1
NetC10_1: C10.1 C11.2 C66.1 C67.2 D20.1 D21.2 | length 10.5
  Top Layer w0.4: C10.1 53.225,14.075 C11.2@55.05,12.25 ; v1(55.061,12.261) C11.2@55.05,12.25 ; D21.2 56.682,12.066 55.05,12.066 C11.2@55.05,12.25
  Bottom Layer w0.4: C66.1 53.25,14 55.05,12.2 C67.2 56.167,13.131 56.169,13.131 56.95,13.911 D20.1
NetC11_1: C11.1 C12.2 C67.1 C68.2 D22.1 D23.2 | length 10.1
  Top Layer w0.4: C11.1 53.975,11.316 53.975,11.305 54.414,10.866 54.425,10.866 C12.2@54.933,10.358 ; C12.2 56.448,10.045 D23.2
  Bottom Layer w0.4: C67.1 53.25,12.003 55.05,10.203 C68.2 ; C68.2@55.169,10.306 56.95,12.086 D22.1
  other v1: 55.025,10.45
NetC12_1: C12.1 C13.2 C68.1 C69.2 D24.1 D25.2 | length 10.6
  Top Layer w0.4: C12.1 53.225,9.75 53.75,9.225 53.836,9.225 54.275,8.786 54.275,8.7 C13.2@54.688,8.287 ; C13.2 56.214,8.025 D25.2
  Bottom Layer w0.4: C68.1 53.25,9.971 54.425,8.796 54.425,8.775 55.05,8.15 C69.2 ; C69.2@55.219,8.231 56.364,9.375 56.475,9.375 56.975,9.875 D24.1
  other v1: 54.925,8.525
NetC13_1: C13.1 C69.1 D26.1 D27.2 | length 11
  Top Layer w0.4: C13.1 53.225,7.497 54.125,6.597 54.147,6.597 54.375,6.825 56.8,6.825 D27.2
  Bottom Layer w0.4: C69.1@53.2,8.075 ccw(c54.588,8.075) 53.607,7.093 v1(54.125,6.575) 54.673,6.575 ccw(c54.673,9.115) 56.469,7.319 56.525,7.375 ccw(c55.378,8.522) D26.1@56.975,8.24 ; D26.1@57,8.725 D26.1@57,8.522 ; D26.1@56.975,8.24 ccw(c55.378,8.522) D26.1@57,8.522 ; D26.1@56.975,8.24 57,8.264 D26.1@57,8.522
NetC26_1: C26.1 C27.2 C55.1 C56.2 D25.1 D26.2 | length 10.2
  Top Layer w0.4: D25.1 61.711,8.761 ccw(c61.919,8.969) 61.919,8.675 C55.1
  Bottom Layer w0.4: D26.2@59.4,8.725 C27.2@61.725,8.725 ; v1(61.725,8.775) C27.2 ; C27.2@61.75,8.725 64.4,8.725 C26.1
NetC28_1: C28.1 R1.1 T1.6 | length 5.5
  Top Layer w0.4: R1.1 44.75,17.6 C28.1 45.77,17.87 45.77,19.595 T1.6
NetC29_1: C29.1 C30.1 C31.1 D29.2 LX1.2 R3.1 R7.1 U1.5 | length 22.1
  Bottom Layer w0.3: C31.1 36.975,11.6 LX1.2 ; C31.1@35.085,9.64 R3.1 36.365,6.475 38.725,6.475 C29.1 39.914,7.664 U1.5 42.225,6.539 42.225,3.3 D29.2 ; 42.408,4.725 R7.1 46.925,4.725 C30.1
NetC29_2: C29.2 R3.3 U1.4 | length 4.8
  Bottom Layer w0.4: R3.3 36.95,5.8 C29.2 41.064,5.8 U1.4
NetC30_2: C30.2 R6.2 R7.2 U1.3 | length 6.7
  Bottom Layer w0.3: U1.3 44.439,5.764 44.8,6.125 R7.2 46.925,6.125 C30.2 48.9,4.2 R6.2
NetC32_2: C32.2 D28.1 R4.1 U3.2 U3.6 | length 14.3
  Top Layer w0.4: U3.6 41.345,9.535 42.615,8.265 ; R4.1@42.375,5.395 42.375,8.025 42.615,8.265 ; R4.1 44.675,3.095 D28.1 ; C32.2 44.365,8.175 U3.2 42.615,8.265
NetC33_1: C33.1 U3.5 | length 2.4
  Top Layer w0.4: C33.1 38.98,11.3 U3.5
NetC34_1: C34.1 C35.1 LX2.2 R10.2 R13.1 U2.5 | length 17.8
  Bottom Layer w0.4: LX2.2 27.625,30.25 C35.1 30.485,31.725 U2.5 ; R13.1 29.275,26.53 29.275,30.09 U2.5 ; C34.1@31,29.825 30.698,30.127 U2.5 ; R10.2 34.251,31.749 33.375,32.625 31.81,32.625 U2.5
NetC34_2: C34.2 R13.3 U2.4 | length 5.2
  Bottom Layer w0.4: U2.4 32.598,30.023 32.4,29.825 32.4,27.225 R13.3
NetC36_1: C36.1 R1.2 R9.1 | length 3.8
  Top Layer w0.4: R9.1 40.95,17.25 C36.1 42.675,18.025 R1.2
NetC37_1: C37.1 R12.2 U2.1 | length 7.8
  Top Layer w0.4: R12.2 28.375,35.25 ; C37.1@27.05,33.775 27.05,33.925 28.375,35.25 ; v1(30.675,35.25) 28.375,35.25
  Bottom Layer w0.4: v1(30.675,35.25) 30.698,35.25 U2.1
NetC37_2: C37.2 Q2.1 R20.2 | length 23
  Top Layer w0.4: Q2.1 7.175,31.875 8.425,31.875 ; R20.2 9.29,31.01 8.425,31.875 ; C37.2 10.332,33.782 8.425,31.875
NetC39_1: C39.1 P1.5 U5.4 | length 4.9
  Top Layer w0.4: P1.5@1.375,8.08 3.52,8.08 C39.1 4.85,8.1 U5.4@5.75,8.1
NetC40_1: C40.1 Q2.2 R14.1 | length 4.3
  Top Layer w0.4: R14.1 C40.1 7.95,30.175 Q2.2
NetC41_1: C41.1 LX3.2 R2.2 U3.8 | length 7.8
  Top Layer w0.4: C41.1 35.45,7.125 37.225,7.125 R2.2 37.395,6.995 U3.8
NetC42_1: C42.1 P1.3 U4.1 U4.3 | length 31.6
  Top Layer w0.4: v2@3.9,11.9 9.275,11.9 15.675,5.5 C42.1 23.75,5.775 U4.1 26.25,5.775 26.6,5.425 26.6,4.15 26.325,3.875 U4.3
  Bottom Layer w0.4: P1.3 2.231,13.145 3.351,12.025 v2(4.275,12.025)
NetD28_2: D28.2 R2.1 R4.2 U3.7 | length 10.6
  Top Layer w0.4: R2.1 37.485,8.265 U3.7 39.565,8.175 40.875,8.175 41.175,7.875 R4.2 39.075,3.095 D28.2
NetP1_1: P1.1 Q2.3 | length 18.4
  Top Layer w0.4: P1.1 1.4,18.25 1.4,29.55 4.85,33 Q2.3
NetP1_2: P1.2 R15.2 | length 2.1
  Top Layer w0.4: P1.2 3.39,15.685 R15.2@3.475,15.6
NetP1_6: P1.6 R19.2 | length 5.7
  Top Layer w0.4: P1.6 1.425,5.5 3.95,2.975 R19.2
NetQ1_1: Q1.1 R8.1 R11.2 | length 6.4
  Top Layer w0.4: R11.2 47.075,12.35 R8.1 48.5,15.982 47.275,17.207 Q1.1
NetQ1_3: Q1.3 T1.5 | length 4.2
  Top Layer w0.4: T1.5 48.625,17.525 Q1.3
NetR5_1: R5.1 U1.1 | length 2
  Bottom Layer w0.4: U1.1 44.586,8.75 R5.1
NetR5_2: R5.2 U3.4 | length 5.4
  Top Layer w0.4: v1(42.175,10.15) 42.175,10.225 42.755,10.805 U3.4
  Bottom Layer w0.4: v1(42.175,10.15) 42.25,10.075 42.325,10.15 R5.2
NetR8_2: R8.2 U3.3 | length 5.8
  Top Layer w0.4: U3.3 46.36,9.535 48.5,11.675 R8.2
NetR10_1: R10.1 R16.2 U2.3 | length 8.4
  Bottom Layer w0.4: U2.3 33.712,33.913 R10.1@34.325,33.299 ; R10.1@34.561,33.149 R10.1 R10.1@34.325,33.299 ; R16.2 34.325,37.675 R10.1@34.325,33.299
NetR12_1: "Sig Out.1" R12.1 | length 20
  Top Layer w0.4: 5.85,36.15 10.35,36.15 11.175,36.975 25.25,36.975 R12.1
NetR18_1: R18.1 U5.5 | length 3.1
  Top Layer w0.4: R18.1@5.825,4.225 5.825,5.55 ; U5.5 5.975,6.025 R18.1
NetR19_1: R19.1 U5.1 | length 3.9
  Top Layer w0.4: R19.1 7.65,3.2 8.25,3.2 8.25,5.525 ; 8.225,5.55 8.25,5.525 ; U5.1 8.25,5.525
PUMP: C1.2 C57.2 D1.2 T1.4 | length 21.2
  Top Layer w0.4: T1.4 44.425,33.05 v2@50.35,33.05 ; v2(50.35,33) v2@50.35,33.05 ; C1.2 C1.2@52.675,33.05 ; D1.2 cw(c57.607,30.857) 56.678,30.857 56.678,32.979 ccw(c55.729,32.979) 56.4,33.65 ccw(c55.012,32.262) 55.012,34.225 54.775,34.225 ccw(c54.775,31.992) 53.927,34.058 ccw(c54.775,31.992) 53.196,33.571 C1.2@52.675,33.05 ; v2@50.35,33.05 C1.2@52.675,33.05
  Bottom Layer w0.4: v2(50.35,33) 50.55,33.2 C57.2
VCC: C38.2 LX1.1 LX2.1 LX3.1 R15.1 U4.5 | length 61
  Top Layer w0.4: R15.1@4.875,15.6 10.55,15.6 16.75,9.4 29.261,9.4 29.411,9.55 ; v3(27.6,23.025) 29.411,21.214 29.411,9.55 ; U4.5 27.922,5.578 C38.2 29.411,7.986 ; LX3.1 35.4,9.45 34.25,10.6 32.025,10.6 29.411,7.986 ; 29.411,7.986 29.411,9.55
  Bottom Layer w0.4: v3(27.6,23.025) 27.625,23.05 LX2.1 ; v1(34.025,10.639) 34.025,11 LX1.1
pads on no net: T1.2 T1.3 T1.7 T1.8

## Polygon pours and split planes (outlines as drawn)
GND on Bottom Layer "Bottom Laye" (solid, remove dead copper, pour order 53): 17.85,1.525 17.85,5.675 20.9,8.725 22.175,8.725 25.7,12.25 28.325,14.875 31.425,14.875 31.5,14.8 31.5,1.325
GND on Bottom Layer "Bottom Laye" (solid, remove dead copper, pour order 51): 0.4,14.875 8.225,8.675 9.85,7.35 10.2,7 10.2,2 9.85,2 0.325,2
no net on Bottom Layer "Bottom Layer-No Net 1" (solid, pour order 39): 86.45,0.36 86.45,5.56 86.425,5.585 82.2,7.185 82.2,0.41
GND on Bottom Layer "Bottom Layer-No Net 1" (solid, pour order 37): 82.242,39.75 86.55,39.75 86.55,35.525 86.525,35.5 82.257,33.139
GND on Bottom Layer "Bottom Layer-No Net 1" (solid, pour order 28): 72.1,33.275 67.35,33.275 64.5,36.125 36.6,36.125 36.475,36.25 35.175,37.8 36.174,38.909 36.875,38.925 71.025,39.7 72.025,38.7
GND on Bottom Layer "Bottom Layer-No Net 1" (solid, pour order 22): 26.3,24 35.5,24 36.875,25.375 36.875,38.925 36.159,39.048 26.3,38.775
GND on Bottom Layer "Bottom Layer-No Net 1" (solid, pour order 18): 50.525,29.9 50.525,14.4 49.675,13.55 41.975,13.55 39.65,15.875 39.65,29.325 40.2,29.875
GND on Bottom Layer "Bottom Layer-No Net 1" (solid, pour order 12): 32.975,0.65 49.675,0.65 50.325,1.3 50.325,11.775 48.9,13.2 33.425,13.2 32.9,12.675
no net on Top Layer "Bottom Layer-No Net 1" (solid, pour order 35): 86.45,0.4 86.45,5.6 86.425,5.625 82.2,7.225 82.2,0.45
GND on Top Layer "Bottom Layer-No Net 1" (solid, pour order 33): 82.242,39.75 86.55,39.75 86.55,35.525 86.525,35.5 82.257,33.139
GND on Top Layer "Bottom Layer-No Net 1" (solid, pour order 32): 24.85,32.775 14.025,32.775 3.575,32.7 2.525,31.45 1.175,30.1 1.175,1.8 1.975,1 30.975,1 31.425,1.45 31.425,20.925 30.45,21.9 28.25,21.9 26.85,23.3 25.55,23.3 24.775,24.075 24.775,32.825
GND on Top Layer "Bottom Layer-No Net 1" (solid, pour order 30): 5.55,38.425 5.55,35.775 6.425,35.225 15.425,34.95 24.55,34.95 25.4,35.8 25.325,38.675 24.975,38.85
GND on Top Layer "Bottom Layer-No Net 1" (solid, pour order 26): 72.1,33.275 67.35,33.275 64.5,36.125 36.6,36.125 36.475,36.25 35.875,39.025 36.85,39.025 71.025,39.7 72.025,38.7
GND on Top Layer "Bottom Layer-No Net 1" (solid, pour order 24): 35.525,24 36.85,25.325 36.85,38.85 35.875,39.025 26.3,38.85 26.3,24
GND on Top Layer "Bottom Layer-No Net 1" (solid, pour order 20): 39.65,29.625 39.65,14.125 40.5,13.275 48.2,13.275 50.525,15.6 50.525,29.05 49.975,29.6
GND on Top Layer "Bottom Layer-No Net 1" (solid, pour order 16): 46.649,1.074 46.698,1.025 46.875,1.075 ccw(c47.501,3.564) 47.875,1.025 ccw(c47.371,2.757) 48.5,1.35 48.5,10.598 ccw(c45.96,10.598) 47.756,12.394 47.3,12.85 33.275,12.85 32.9,12.475 32.9,1.35 33.275,1.35 33.6,1.225
no net on Top Solder "Bottom Layer-No Net 1" (solid, pour order 47): 82.242,39.75 86.55,39.75 86.55,35.525 86.525,35.5 82.257,33.139
no net on Top Solder "Bottom Layer-No Net 1" (solid, pour order 43): 86.45,0.44 86.45,5.64 86.425,5.665 82.2,7.265 82.2,0.49
no net on Bottom Solder "Bottom Layer-No Net 1" (solid, pour order 49): 82.242,39.75 86.55,39.75 86.55,35.525 86.525,35.5 82.257,33.139
no net on Bottom Solder "Bottom Layer-No Net 1" (solid, pour order 45): 86.45,0.36 86.45,5.56 86.425,5.585 82.2,7.185 82.2,0.41

## Keep-outs
Keep-Out Layer:
  lines w0.1: 87.025,0 87.025,6 72.275,11.225 72.325,26.45 87.025,35.225 87.025,40.275 0,38.7 0,1.575 87.025,0.025

## Silkscreen, mask and mechanical layers (free items; w line width, h text height)
Top Overlay:
  text "Блок сопрежения зонда" at 17.95,30.225 h1.52
  text "дозиметра ДРГ3-(02,03)" at 19.444,28.145 h1.52
  text "версия 1.3" at 22.05,25.175 h1.52
  text "Быканов Андрей" at 20.155,21.764 h1.52
  text "(с) г.Тула, 2016г." at 20.155,19.7 h1.52

## Text inside footprints (layer, text, board x,y; h text height)
BATcon: Bottom Overlay "+" at 13.795,9.365 h1.52 r270; Bottom Overlay "LIR2430" at 13.935,15.595 h1.52 r270
Dinode: Top Overlay "1" at 70.783,9.935 h1.27 r90; Top Overlay "2" at 68.243,9.935 h1.27 r90; Top Overlay "1" at 70.783,27.207 h1.27 r90; Top Overlay "1" at 70.783,28.223 h1.27 r90; Top Overlay "12" at 68.243,27.207 h1.27 r90